# Altium PCB Project_2_Slave_PCB_V1_1.PcbDoc
Units mil, origin at the board's own origin, x right, y up, seen from the top; angles counter-clockwise.
Board outline 3444 x 3925 mil, 2 copper layers (Top Layer, Bottom Layer); 82 components, 95 nets, 252 pads, 68 vias.
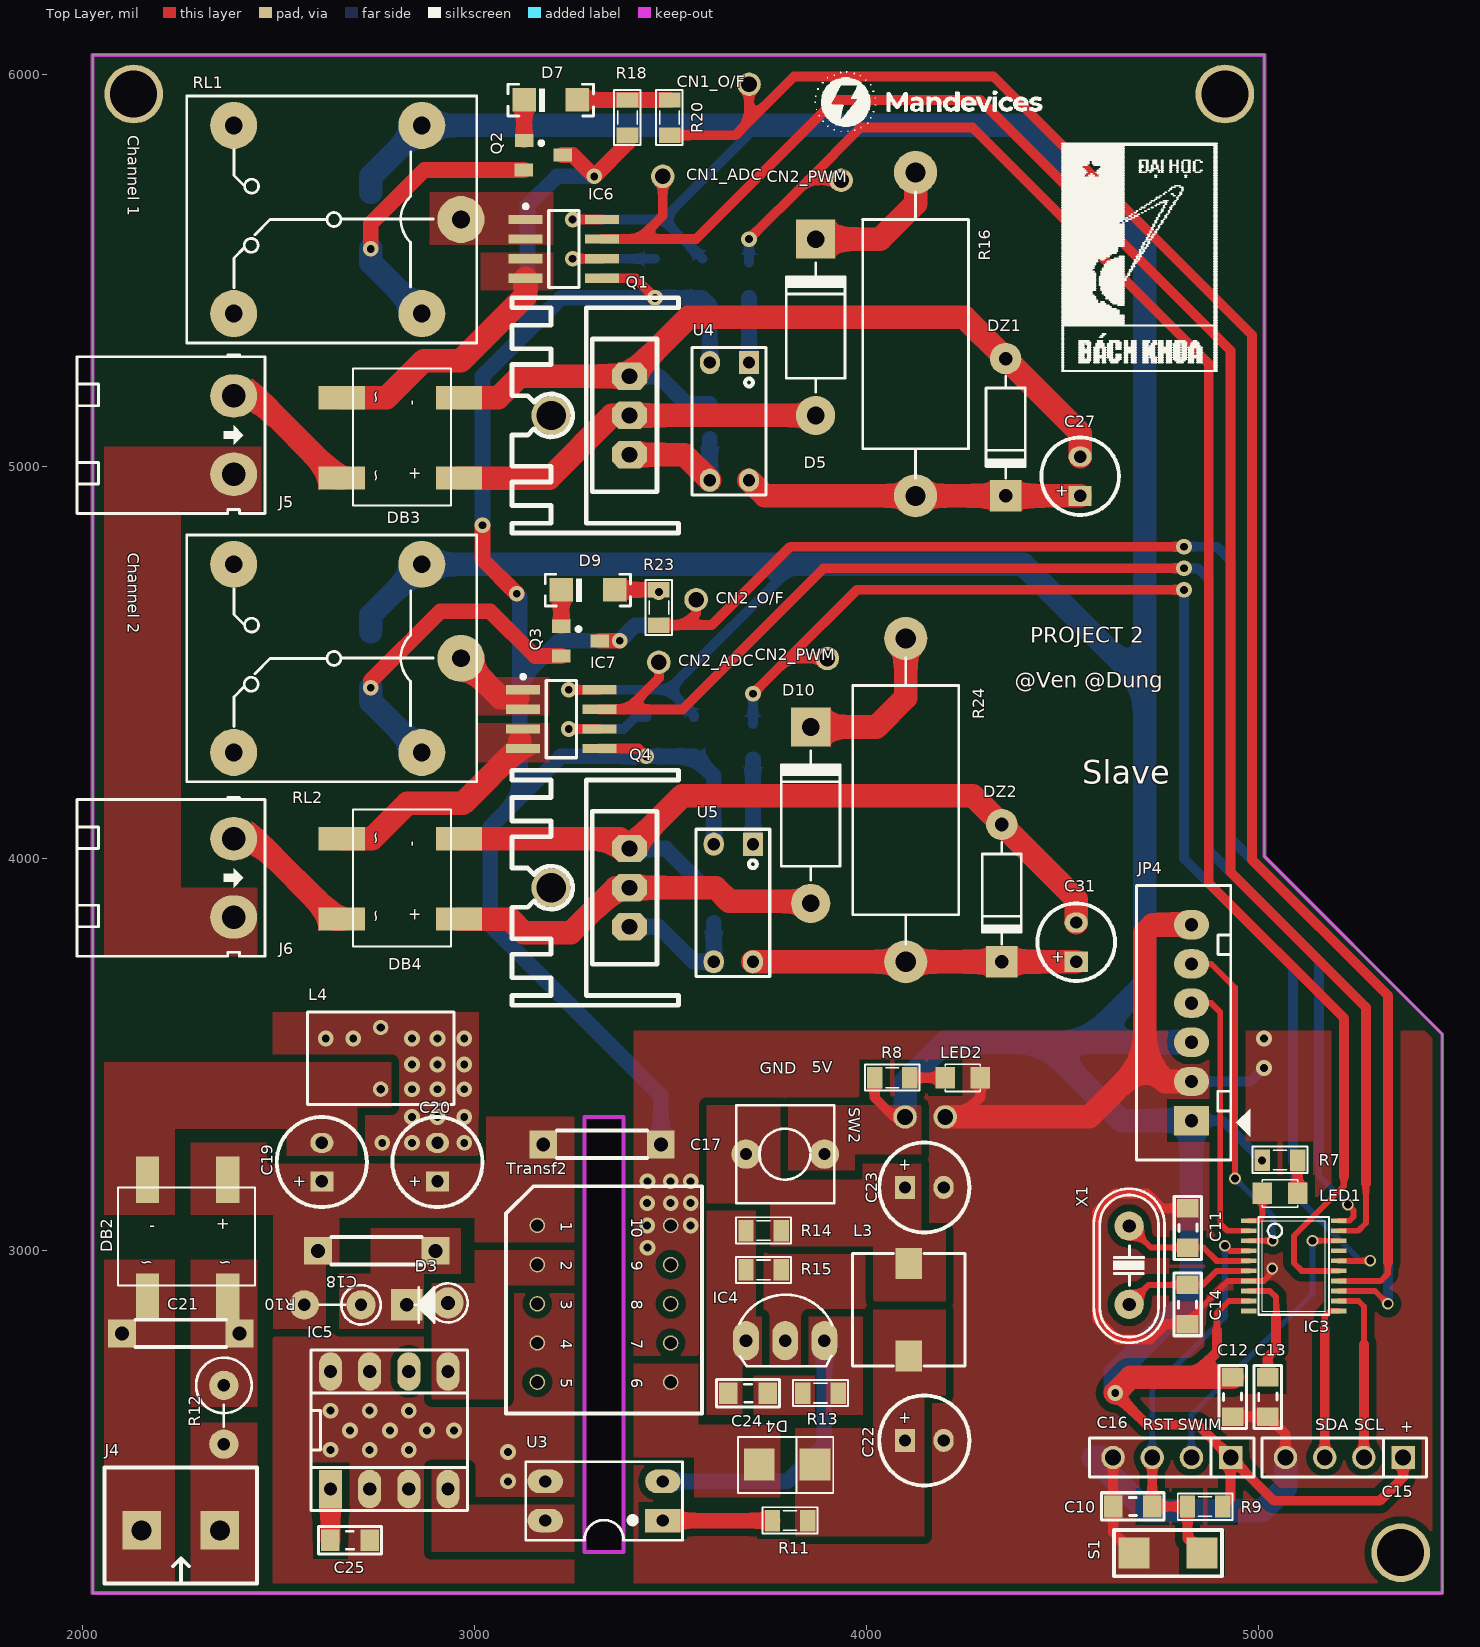
[diagram p0: Top Layer view]
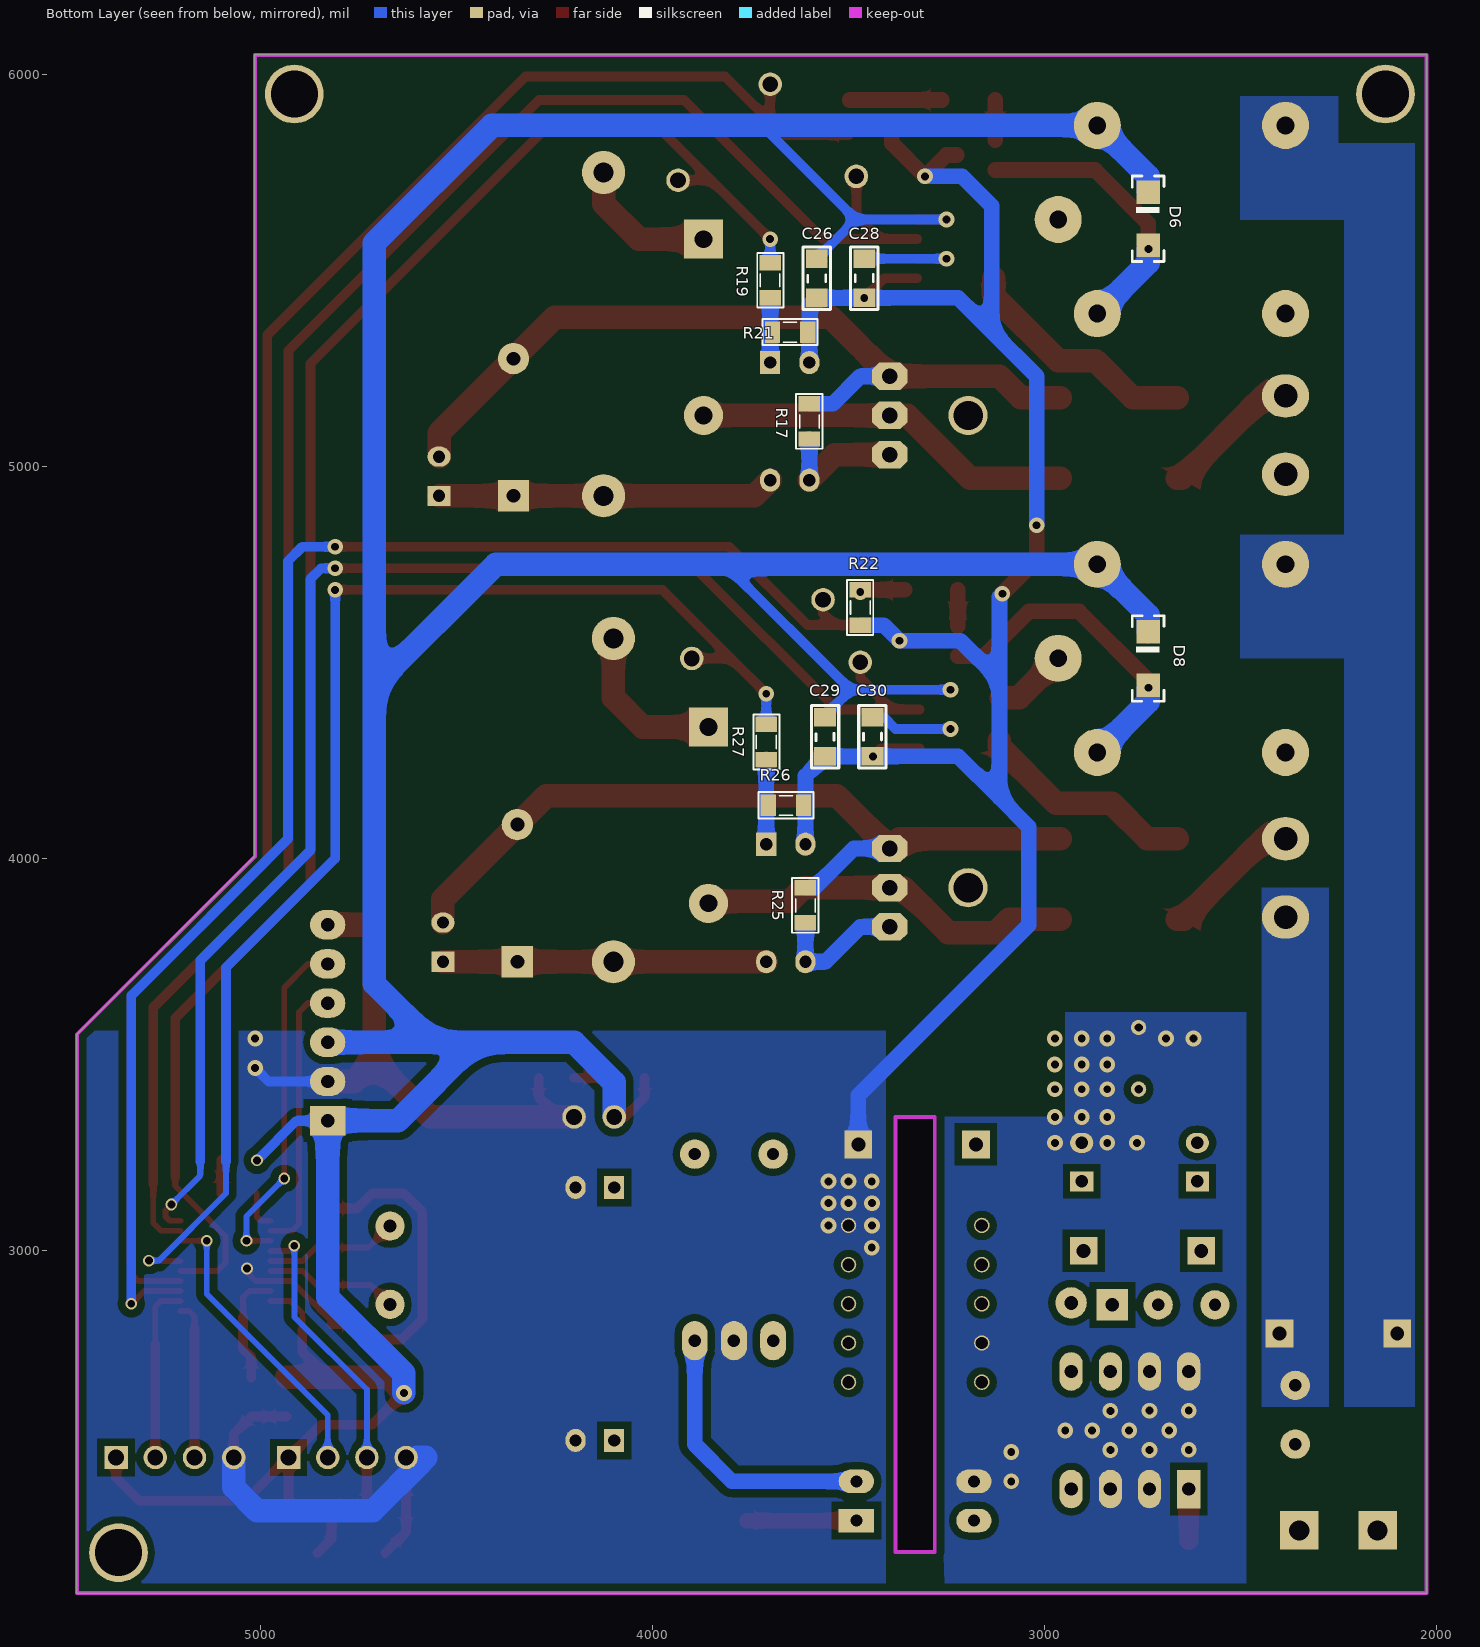
[diagram p1: Bottom Layer view, seen from below]
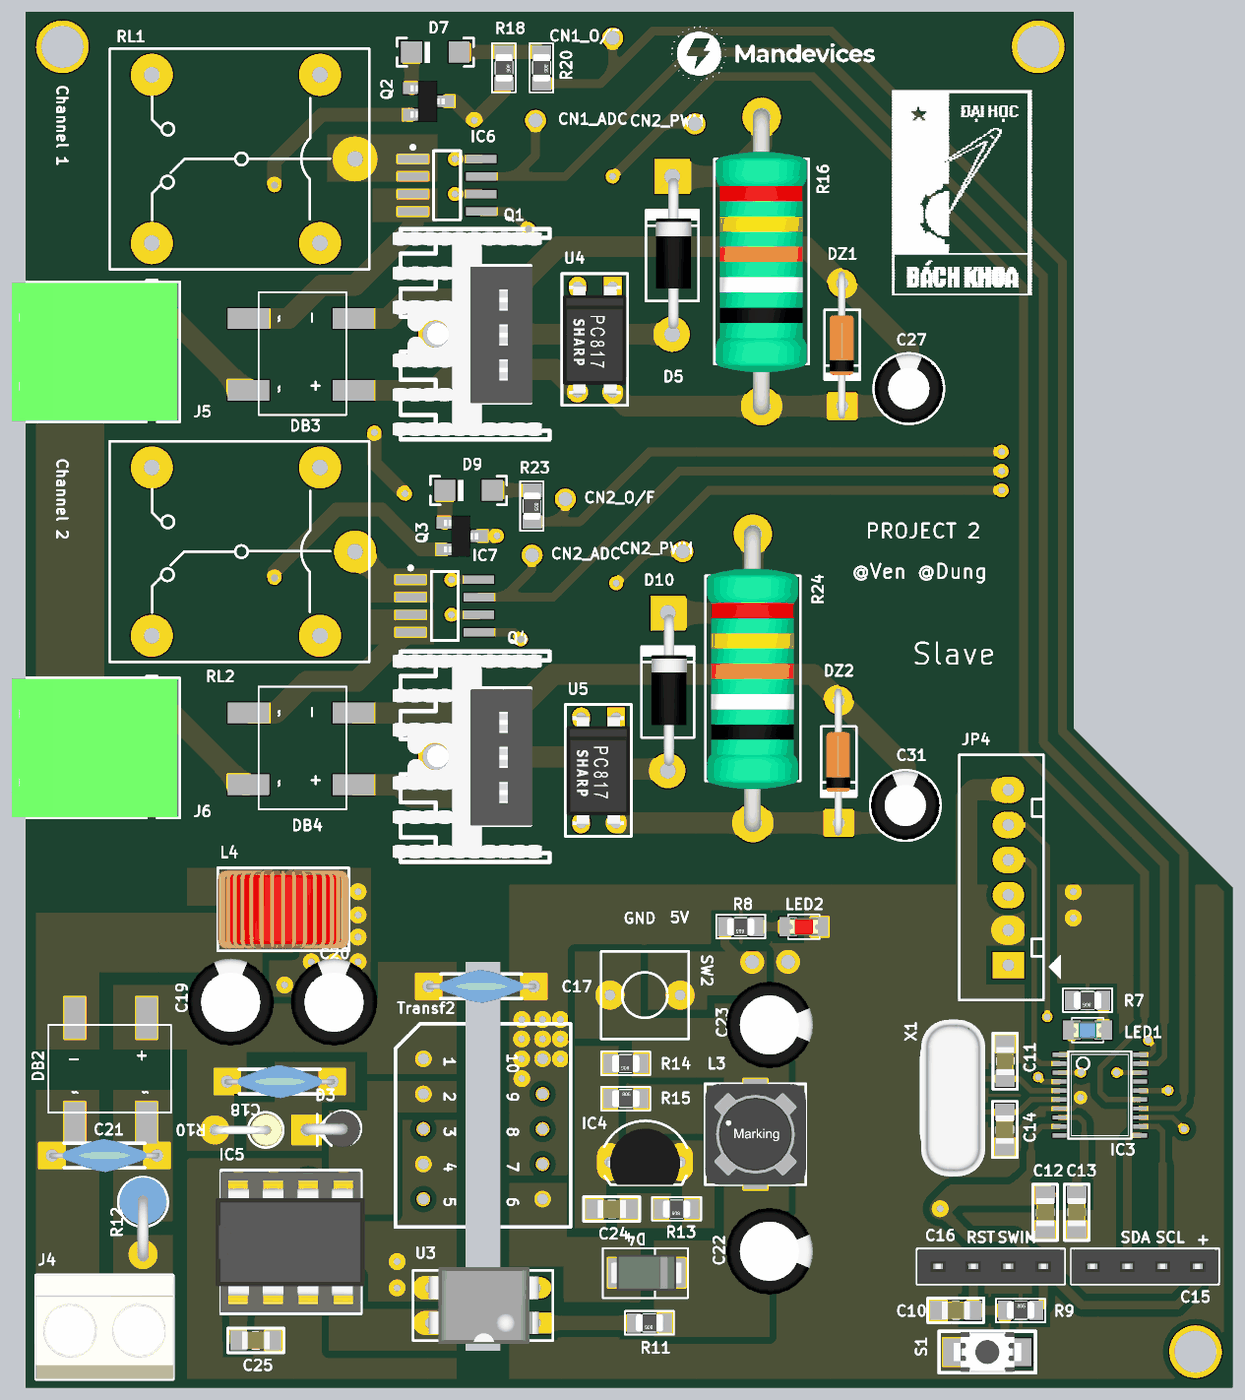
[diagram p2: 3D render of the assembled board from above, using the file's embedded part models]
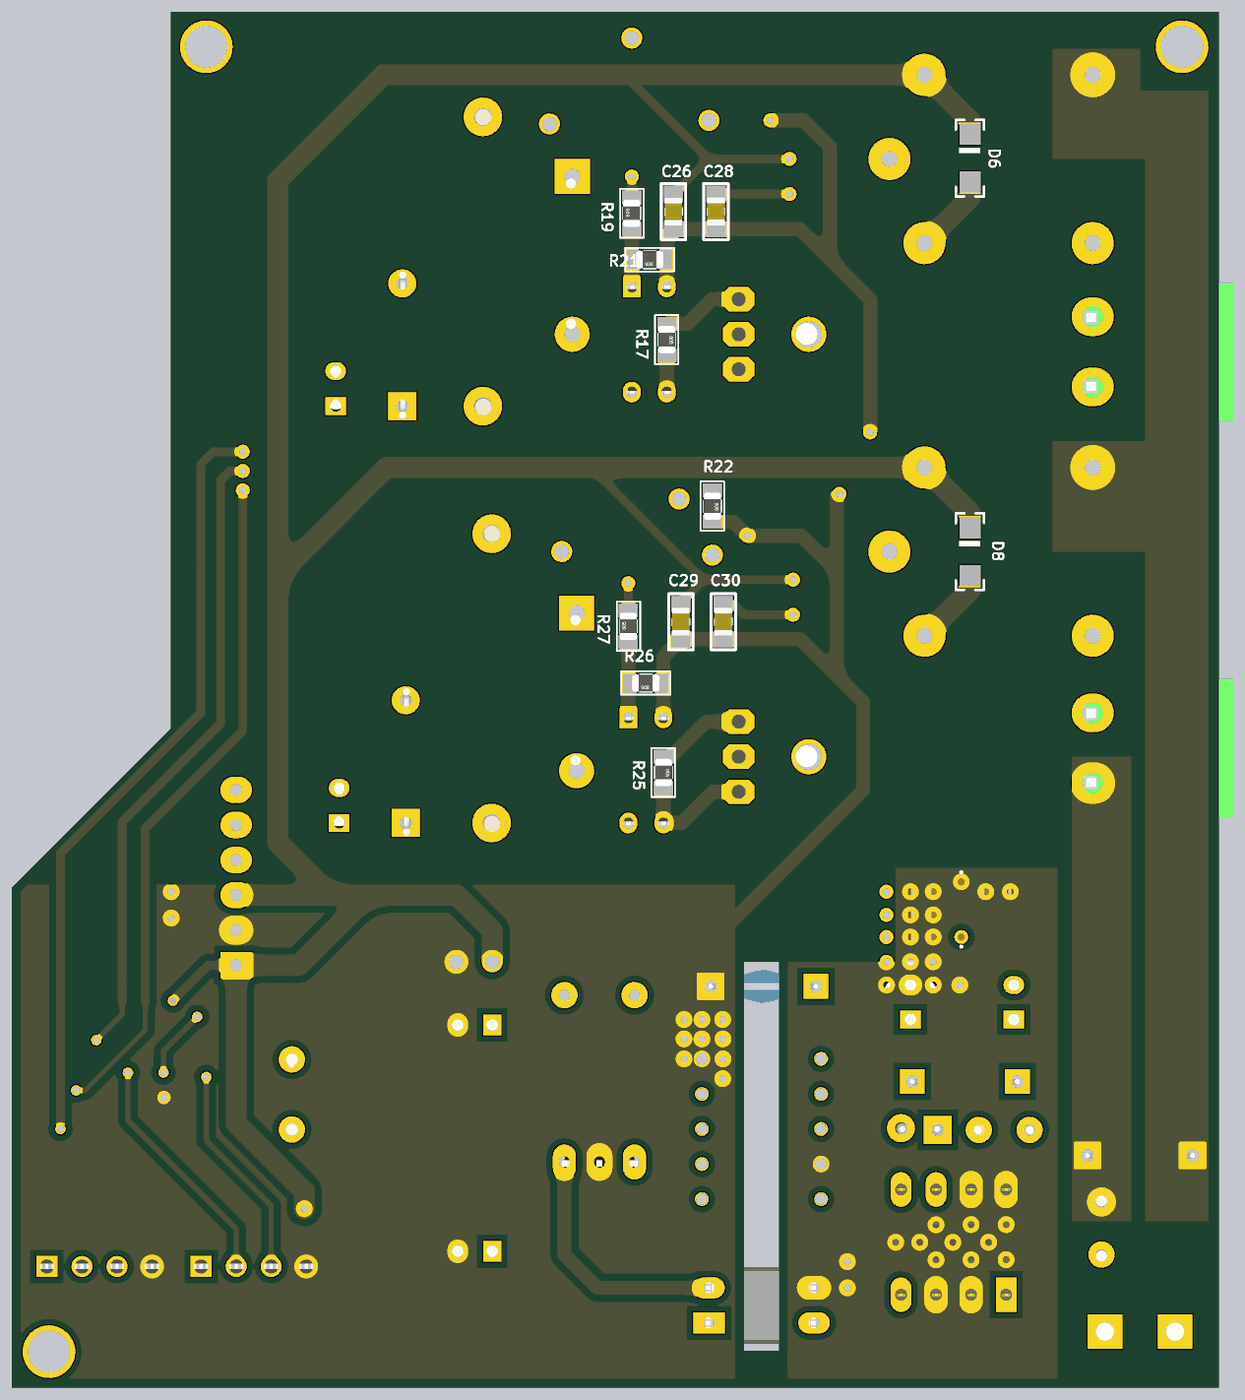
[diagram p3: 3D render of the assembled board from below, using the file's embedded part models]

## Layer stack, top to bottom
Top Solder: solder mask 0.4, Solder Resist, Dk 3.5
Top Layer: signal copper 1.4
Dielectric 1: dielectric 12.6, FR-4, Dk 4.8
Bottom Layer: signal copper 1.4
Bottom Solder: solder mask 0.4, Solder Resist, Dk 3.5

## Board outline
2025,2125 2025,6050 5015,6050 5015,4005 5469,3551 5469,2125
cut-out: 3280,2230 3380,2230 3380,3340 3280,3340

## Design rules (kind name [scope] priority, off if disabled: settings)
Clearance [All] p1: gap=20 ignorepadtopadclearanceinfootprint=TRUE except(0: Arc-Text Arc-Hole Track-Text Track-Hole SMDPad-Text SMDPad-Hole THPad-Text THPad-Hole Via-Text Via-Hole Fill-Text Fill-Hole Poly-Text Poly-Hole Region-Text Region-Hole Text-Text Text-Hole; 10: Arc-Arc Arc-Track Arc-SMDPad Arc-THPad Arc-Via Track-Track Track-SMDPad Track-THPad Track-Via SMDPad-SMDPad SMDPad-THPad SMDPad-Via THPad-THPad THPad-Via Via-Via; 18: THPad-Fill THPad-Poly THPad-Region)
PolygonConnect [All] p1: connectstyle=Direct reliefconductorwidth=10 reliefentries=4 polygonreliefangle="90 Angle" airgapwidth=10
RoutingVias [All] p1: holewidth=20 width=40 viastyle="Through Hole" minholewidth=15 minwidth=25 maxholewidth=25 maxwidth=45
SolderMaskExpansion [All] p1: expansion=4
Width [All] p1: maxlimit=60 minlimit=15 preferedwidth=25
30 further rules are at their usual default settings.

## Classes and differential pairs
component class 8: JP4
component class 7: C26 C27 C28 C29 C30 C31 D5 D6 D7 D8 D9 D10 DB3 DB4 DZ1 DZ2 IC6 IC7 J5 J6 Q1 Q2 Q3 Q4 R16 R17 R19 R20 R23 R24 R25 R26 R27 RL1 RL2 U4 U5
component class 6: C17 C18 C19 C20 C21 C22 C23 C24 C25 D3 D4 DB2 IC4 IC5 J4 L3 R10 R11 R12 R13 R14 R15 SW2 Transf2 U3
component class 5: C10 C11 C12 C13 C14 C15 C16 IC3 LED1 LED2 R7 R8 R9 S1 X1

## Components (designator, comment, footprint, x,y, rotation, side; value= is the part's Value field where it differs from the comment)
C10 "1uF" CAP_0805 4679,2347 r0 top value=33p
C11 "22pF" CAP_0805 4819,3056.61 r90 top value=33p
C12 "100nF" CAP_0805 4933,2625.5 r90 top value=33p
C13 "1uF" CAP_0805 5023,2625.5 r90 top value=33p
C14 "22pF" CAP_0805 4820,2861.61 r270 top value=33p
C15 "JP4" JP4-C1T 5369,2471 r180 top
C16 "JP4" JP4-C1T 4929,2471 r180 top
C17 "1nF/400v" 103/2KV 3475.04,3270 r180 top
C18 "1nF/400V" 103/2KV 2600,2998.34 r0 top
C19 "6.8uF/400V" C8mm 2610,3224.71 r90 top
C20 "6.8uF/400V" C8mm 2905,3224.71 r90 top
C21 "20D471K" 103/2KV 2100,2787.5 r0 top
C22 "1000uF/16V" C8mm 4147.38,2514.45 r0 top
C23 "470uF/16V" C8mm 4147.38,3160 r0 top
C24 "100nF" CAP_0805 3697.38,2636 r0 top value=33p
C25 "100nF" CAP_0805 2681.99,2259 r180 top value=33p
C26 "100nF" CAP_0805 3580,5480 r270 bottom value=33p
C27 "Cap Pol" C5mm 4545,4975 r90 top
C28 "10nF" CAP_0805 3461,5480 r90 bottom value=33p
C29 "100nF" CAP_0805 3559,4310 r270 bottom value=33p
C30 "10nF" CAP_0805 3440,4310 r90 bottom value=33p
C31 "Cap Pol" C5mm 4535,3786 r90 top
D3 "1N4937" DIO-1AN 2876.99,2860.5 r0 top value=1N5007
D4 "SS14" DO-214AC(SMA) 3775,2450 r180 top value=1N5007
D5 "1N4007" D2A 3870,5580 r270 top
D6 "1N4148" 1N4148_SMD 2735,5632.09 r90 bottom value="Diode c?m 1N5408"
D7 "1N4148" 1N4148_SMD 3193.91,5935 r180 top value="Diode c?m 1N5408"
D8 "1N4148" 1N4148_SMD 2735,4510 r90 bottom value="Diode c?m 1N5408"
D9 "1N4148" 1N4148_SMD 3288.91,4685 r180 top value="Diode c?m 1N5408"
D10 "1N4007" D2A 3857.5,4335 r270 top
DB2 "Diode Bridge" DB207S 2270,3030 r0 top
DB3 "Diode Bridge Flate" DB207S 2810,5070 r270 top
DB4 "Diode Bridge Flate" DB207S 2810,3945 r270 top
DZ1 "Zener-12V" D1A 4355,5275 r90 top
DZ2 "Zener-12V" D1A 4345,4086 r90 top
IC3 "STM8S003F3P6" TSSOP-20 5090,2960 r270 top value=24Cxx
IC4 "TL431" qto-92 3792.38,2769 r0 top
IC5 "TNY264" DIP8 2780,2540.5 r90 top
IC6 "Current Sensor IC" SOIC-8 3227.44,5555 r0 top
IC7 "Current Sensor IC" SOIC-8 3221,4355 r0 top
J4 "AC-IN" KF2-5.08 2250,2285 r180 top
J5 "LOAD1" KF2-5.08T 2385,5180 r270 top
J6 "LOAD2" KF2-5.08T 2385,4050 r270 top
JP4 "Con6" CON6 4829,3330.42 r90 top value="Connector 6"
L3 "2.2uF" L-SMD-M-7.3x4.5 4107.38,2848.11 r180 top value="150 mH"
L4 "100uF" L-DIP-M-9.5x6 2760,3489.5 r90 top value="150 mH"
LED1 "LED" LED-0805-Blue 5100,3145 r180 top value="LED 3 ly Single Colour"
LED2 "LED" LED-0805-Red 4200.51,3440 r0 top value="LED 3 ly Single Colour"
Q1 "IRF840" QTO-220H3 3395,5030 r90 top
Q2 "2SC1815" SOT23 3175,5795 r270 top value=C1815
Q3 "2SC1815" SOT23 3270,4555 r270 top value=C1815
Q4 "IRF840" QTO-220H3 3395,3825 r90 top
R7 "1k" RES-SMD-0805 5055,3230 r180 top
R8 "1k" RES-SMD-0805 4065.51,3440 r180 top
R9 "10k" RES-SMD-0805 4864,2346 r0 top
R10 "200k" RES-1/4WD 2645,2860.5 r180 top
R11 "200R" RES-SMD-0805 3805,2310 r180 top
R12 "2R" RES-1WD 2360,2590 r270 top
R13 "3.3k" RES-SMD-0805 3882.37,2635 r180 top
R14 "10k" RES-SMD-0805 3737.37,3050 r180 top
R15 "10k" RES-SMD-0805 3737.38,2950 r0 top
R16 "56k/2W" RES-2W 4120,5345 r270 top value="R1/4W - 1K"
R17 "10k" RES-SMD-0805 3600,5115 r270 bottom value="R1/4W - 1K"
R18 "100k" RES-SMD-0805 3390,5890 r270 top
R19 "1k" RES-SMD-0805 3700,5475 r90 bottom
R20 "100R" RES-SMD-0805 3497.25,5890 r270 top
R21 "100k" RES-SMD-0805 3649,5342.31 r0 bottom
R22 "100k" RES-SMD-0805 3470,4640 r270 bottom
R23 "100R" RES-SMD-0805 3470,4640 r270 top
R24 "56k/2W" RES-2W 4095,4156 r270 top value="R1/4W - 1K"
R25 "10k" RES-SMD-0805 3610,3880 r270 bottom value="R1/4W - 1K"
R26 "100k" RES-SMD-0805 3660,4135 r0 bottom
R27 "1k" RES-SMD-0805 3710,4297 r90 bottom
RL1 "Relay 10A/12V" RL_SPDT_10A 2965,5630 r180 top value="Relay SPDT, 10A, 12V"
RL2 "Relay 10A/12V" RL_SPDT_10A 2965,4510 r180 top value="Relay SPDT, 10A, 12V"
S1 "SW-SMD" "SW 3x2x4" 4769,2227 r0 top
SW2 "SW" SW2 3692.38,3245 r0 top value="SW chip 2 pin"
Transf2 "Transformer EE16" "Transformer EE12.7" 3330,2863.18 r270 top
U3 "PC817" DIP4/W0.3 3480,2310 r90 top
U4 "OPTO" OPTO 3700,5264 r270 top value=TLP5211
U5 "OPTO" OPTO 3710,4035 r270 top value=TLP5211
X1 "8Mhz" XT2 4670,2961.61 r90 top value=4Mhz

## Footprints (in the part's own frame and the unit in brackets; to place one, negate y for a bottom-side part, rotate by r counter-clockwise, add the part's x,y. Pads: shape width x height; smd on the part's side, far side on the other; paste and mask are expansions set on the pad)
1N4148_SMD [mil]
  rect 60x60 smd: 1(-67.91,0) 2(67.91,0)
  silkscreen extent -109,-40 109,41, body extent -71,-23 67,25, height 47
103/2KV [mm]
  rect 1.8x1.8 hole 0.9: 1(0,0) 2(7.62,0)
  silkscreen extent 0.89,-0.89 6.73,0.89, body extent -0.19,-1.2 7.81,1.19, height 9.03
C5mm [mm]
  rect 1.3x1.5 hole 0.8: 1(-1.27,0)
  oval 1.3x1.5 hole 0.8: 2(1.27,0)
  silkscreen extent -2.51,-2.51 2.51,2.51, body extent -2.5,-2.5 2.49,2.5, height 11.01
C8mm [mm]
  rect 1.3x1.5 hole 0.8: 1(-1.25,0)
  oval 1.3x1.5 hole 0.8: 2(1.25,0)
  silkscreen extent -2.92,-2.92 2.92,2.92, body extent -3.15,-3.15 3.16,3.15, height 11.51
CAP_0805 [mm]
  rect 1.2x1.4 smd: 1(-1.27,-0.025) 2(1.27,-0.025)
  silkscreen extent -2.03,-0.91 2.03,0.86, body extent -1.01,-0.66 1.01,0.61, height 0.61
CON6 [mil] "CON6"
  rect 75x90 hole 34: 1(0,0)
  oval 75x90 hole 34: 2(100,0) 3(200,0) 4(300,0) 5(400,0) 6(500,0)
  silkscreen extent -100,-150 600,140
D1A [mil] "Diode 1A, W 100mil, L 350mil"
  round 80 hole 35: 1(0,0)
  rect 80x80 hole 35: 2(-350,0)
  silkscreen extent -305,-50 -45,50, body extent -386,-33 34,36, height 84
D2A [mil] "Diode 2A, W 150mil, L 450mil"
  round 100 hole 45: 1(450,0)
  rect 100x100 hole 45: 2(0,0)
  silkscreen extent 61,-75 391,75, body extent 5,-47 435,54, height 100
DB207S [mm] "Bridge Rectifiers 2A 1000V"
  rect 1.5x3 smd: 1(2.54,3.81) 2(2.54,-3.785) 3(-2.667,-3.785) 4(-2.667,3.81)
  silkscreen extent -4.57,-3.05 4.32,3.3
DIO-1AN [mil] "Diode 1A, W 100mil, L 150mil"
  round 80 hole 35: 1(55,5)
  rect 80x80 hole 35: 2(-50,0)
  silkscreen extent -30,-45 105,55, body extent -64,-50 104,55, height 252
DIP4/W0.3 [mil] "4 PIN, W 300mil, Pin to pin 100mil"
  rect 60x90 hole 31: 1(0,0)
  oval 60x90 hole 31: 2(100,0) 3(100,300) 4(0,300)
  silkscreen extent -50,-50 150,350, body extent -59,-10 159,305, height 170
DIP8 [mm]
  rect 2.5x1.5 hole 0.864: 1(-3.81,3.759)
  oval 2.5x1.5 hole 0.864: 2(-3.81,1.219) 3(-3.81,-1.321) 4(-3.81,-3.861) 5(3.81,-3.861) 6(3.81,-1.321) 7(3.81,1.219) 8(3.81,3.759)
  silkscreen extent -5.21,-5.13 5.21,5.03, body extent -5.08,-5.4 5.08,5.4, height 8.1
DO-214AC(SMA) [mm] "DO-214AC Diode Smallest Size"
  rect 2x2.1 smd: 1(1.245,-0.076) 2(-2.367,-0.076)
  silkscreen extent -3.56,-1.86 2.62,1.76, body extent -3.13,-1.38 2.07,1.22, height 2.4
JP4-C1T [mm] "4 row, straight, gold plating"
  rect 1.52x1.52 hole 1.02: 1(0,0)
  round 1.52 hole 1.02: 2(2.54,0) 3(5.08,0) 4(7.62,0)
  silkscreen extent -1.52,-1.27 9.14,1.27, body extent -1.52,-1.25 9.14,1.25, height 8.51
KF2-5.08 [mm]
  rect 2.5x2.5 hole 1.3: 1(-2.54,0) 2(2.54,0)
  silkscreen extent -4.95,-4.08 4.95,3.43, body extent -5,-4.07 5,3.43, height 10
KF2-5.08T [mil] "Header 2, 2 pin, hight 300mil, Pin to Pin 200, Colour Green"
  oval 110x120 hole 60: 1(0,0) 2(200,0)
  silkscreen extent -105,-400 300,80, body extent -97,-399 297,73, height 334
L-DIP-M-9.5x6 [mm] "Body 9.5x6mm, 2 leads"
  round 1 hole 0.55: 1(-2,0) 2(2,0)
  silkscreen extent -3,-4.75 3,4.75, body extent -2.85,-4.75 2.85,4.75, height 9.75
L-SMD-M-7.3x4.5 [mm] "WE-PDA SMD Shielded Power Inductor, 7345"
  rect 1.7x2 smd: 1(0,3) 2(0,-3)
  silkscreen extent -3.65,-3.65 3.65,3.65, body extent -3.65,-3.65 3.65,3.65, height 4.05
LED-0805-Blue [mil]
  rect 50x55 smd: 1(0,0) 2(90,0)
  silkscreen extent 0,-35 90,35, body extent 5,-25 85,25, height 43
LED-0805-Red [mil]
  rect 50x55 smd: 1(0,0) 2(90,0)
  silkscreen extent 0,-35 90,35, body extent 5,-25 85,25, height 43
OPTO [mm]
  rect 1.5x1.3 hole 0.8: 1(-0.025,0)
  oval 1.5x1.3 hole 0.8: 2(-0.025,-2.54) 3(7.595,-2.54) 4(7.595,0)
  silkscreen extent -0.99,-3.68 8.56,1.09, body extent -0.13,-3.59 7.75,1, height 4.81
qto-92 [mil] "TO-92"
  oval 66x100 hole 32: 1(-100,0) 2(0,0) 3(100,0)
  silkscreen extent -117,-65 120,118, body extent -109,-66 109,95, height 245
QTO-220H3 [mil] "TO-220 1-2-3"
  oct 70x90 hole 40: 1(0,0) 2(100,0) 3(200,0)
  round 100 hole 75: ""(100,200)
  silkscreen extent -200,-125 400,300, body extent -190,-102 392,323, height 984
RES-1/4WD [mil]
  round 75 hole 31.5: 1(-65,0) 2(80,0)
  silkscreen extent -115,-50 40,50, body extent -112,-45 92,46, height 379
RES-1WD [mil]
  round 75 hole 31.5: 1(-65,0) 2(85,0)
  silkscreen extent -136,-71 40,71, body extent -135,-67 105,67, height 498
RES-2W [mil] "R2W, 2 pin, 700mil"
  round 110 hole 51.18: 1(-405,5) 2(420,5)
  silkscreen extent -355,-130 375,140, body extent -428,-126 446,134, height 277
RES-SMD-0805 [mil]
  rect 39.37x55 smd: 1(-45,0) 2(45,0)
  silkscreen extent -70,-34 70,33, body extent -39,-25 39,25, height 31
RL_SPDT_10A [mil] "Relay SPDT, 5 pin, 10A,W 650mil, L 800mil, H 800mil"
  round 120 hole 45: 1(0,0) 2(580,240) 3(580,-240) 4(100,-240) 5(100,240)
  silkscreen extent -40,-315 700,315
SOIC-8 [mm] "SOIC, 8-Leads, Body 5,0x4,0mm (max), Pitch 1,27mm, IPC Medium Density"
  rect 2.2x0.6 smd: 1(-2.475,1.905) 2(-2.475,0.635) 3(-2.475,-0.635) 4(-2.475,-1.905) 5(2.475,-1.905) 6(2.475,-0.635) 7(2.475,0.635) 8(2.475,1.905)
  silkscreen extent -2.6,-2.5 0.98,2.88, body extent -3.2,-2.5 3.2,2.5, height 1.75
SOT23 [mm] "SOT 23 _ 1-3-2"
  rect 0.85x1.2 smd: 1(-0.94,-1.245) 2(0.985,-1.25) 3(0.005,1.25)
  silkscreen extent -0.88,-0.25 -0.64,0, body extent -1.47,-1.33 1.53,1.17, height 1.06
SW2 [mil] "SW button 2pin, 250x 250 mil"
  round 75 hole 31: 1(0,0) 2(200,0)
  silkscreen extent -25,-125 225,125
"SW 3x2x4" [mm]
  rect 2x2 smd: 1(-2.2,0) 2(2.2,0)
  silkscreen extent -3.5,-1.5 3.5,1.5, body extent -2.45,-1.45 2.45,1.45, height 2
"Transformer EE12.7" [mm]
  round 1 hole 0.8: 1(-5.08,-4.318) 2(-2.54,-4.318) 3(0,-4.318) 4(2.54,-4.318) 5(5.08,-4.318) 6(5.08,4.318) 7(2.54,4.318) 8(0,4.318) 9(-2.54,4.318) 10(-5.08,4.318)
  silkscreen extent -7.62,-6.35 7.11,6.35
TSSOP-20 [mil] "TSSOP-20"
  rect 12x39 smd: 1(-115.16,-114.87) 2(-89.57,-114.87) 3(-63.98,-114.87) 4(-38.39,-114.87) 5(-12.8,-114.87) 6(12.8,-114.87) 7(38.39,-114.87) 8(63.98,-114.87) 9(89.57,-114.87) 10(115.16,-114.87) 11(115.16,114.87) 12(89.57,114.87) 13(63.98,114.87) 14(38.39,114.87) 15(12.8,114.87) 16(-12.8,114.87) 17(-38.39,114.87) 18(-63.98,114.87) 19(-89.57,114.87) 20(-115.16,114.87)
  silkscreen extent -125,-90 125,90
XT2 [mil] "Footpin for Crystal 2 pin"
  round 75 hole 34: 1(-100,0) 2(100,0)
  silkscreen extent -198,-90 195,90, body extent -233,-93 213,90, height 138

## Part data
C10 C11 C12 C13 C14 C24 C25 C26 C28 C29 C30: library part CapSMD, "Capacitor", LatestRevisionDate=17-Jul-2002, LatestRevisionNote="Re-released for DXP Platform.", PackageReference=RAD-0.3, Published=8-Jun-2000, Publisher="Altium Limited"
C15 C16: "WR-PHD 2.54 mm Angled Socket Header", Manufacturer="Würth Elektronik eiSos GmbH", partNo=613004143121, ComponentLink1 Description=Manufacturer, ComponentLink1URL=http://www.we-online.com, ComponentLink2 Description=Datasheet, ComponentLink2URL=http://katalog.we-online.de/em/datasheet/6130xx143121.pdf, Created by="Karrer Zheng", Created Date="29 March 2013", NoPins=04
C17 C18: library part Cap2KV, "CAP CERAMIC", LatestRevisionDate=17-Jul-2002, LatestRevisionNote="Re-released for DXP Platform.", PackageReference=RAD-0.3, Published=8-Jun-2000, Publisher="Altium Limited"
C19 C20 C22 C23: library part "Cap Pol", "Polarized Capacitor (Axial)", LatestRevisionDate=17-Jul-2002, LatestRevisionNote="Re-released for DXP Platform.", PackageReference=POLAR0.8, Published=8-Jun-2000, Publisher="Altium Limited"
C21: library part Cap2KV, "Varistor", LatestRevisionDate=17-Jul-2002, LatestRevisionNote="Re-released for DXP Platform.", PackageReference=RAD-0.3, Published=8-Jun-2000, Publisher="Altium Limited"
C27 C31: "Polarized Capacitor (Axial)", LatestRevisionDate=17-Jul-2002, LatestRevisionNote="Re-released for DXP Platform.", PackageReference=POLAR0.8, Published=8-Jun-2000, Publisher="Altium Limited"
D3: library part "Diode SMD", "Diode Schottky / 1N4937", Code - JEDEC=DO-214-AB, Published=8-Jun-2000, Publisher="Altium Limited", Revision="July-2002: Re-released for DXP Platform."
D4: library part "Diode SMD", "Diode Schottky / 1N5819", Code - JEDEC=DO-214-AB, Published=8-Jun-2000, Publisher="Altium Limited", Revision="July-2002: Re-released for DXP Platform."
D5 D10: library part D1A, "Diode 1A"
D6 D7 D8 D9: library part 1N5822, "Schottky Rectifiers"
DB2: library part "Diode Bridge Flate"
DB3 DB4: "Diode Bridge"
DZ1 DZ2: library part Zener
IC3: "MCU 8BIT  8KB FLASH TSSOP-20", Copyright by=VanDungEvn
IC4: "Programmable Shunt Regulator"
IC5: "Enhanced, Energy Efficient, Low Power Off-line Switcher"
IC6 IC7: library part ACS712
J4 J5 J6: library part KF2, Manufacturer="Würth Elektronik eiSos GmbH", partNo=691103110002, ComponentLink1 Description=Manufacturer, ComponentLink1URL=http://www.we-online.com, ComponentLink2 Description=Datasheet, ComponentLink2URL=http://katalog.we-online.de/em/datasheet/6911031100xx.pdf, Created by="Karrer Zheng", Created Date="29 October 2013", NoPins=2
JP4: "PLC module"
L3 L4: library part L-DIP-1, "Inductor"
LED1 LED2: "LED Single colour Green and Red"
Q1 Q4: "MOSFET N - CHANNEL 500V - 0.75 - 8A - TO-220"
Q2 Q3: "NPN 600mW, ECB", =C2383
R7 R8 R9 R10 R11 R12 R13 R14 R15 R18 R19 R20 R21 R22 R23 R26 R27: library part "Resistor - SMD", "Resistor", Manufacturer="Generic Components", Class=Passive, Published=08/06/2000, Publisher="Altium Hobart Technology Centre"
R16 R17 R24 R25: library part "Resistor - DIP", "Resistor - DIP"
RL1 RL2: library part "Relay 1", "Relay SPDT,10A - 12VDC 5 Pin", ="Relay SPDT, 10A, 24V"
S1: "Switch", LatestRevisionDate=17-Jul-2002, LatestRevisionNote="Re-released for DXP Platform.", PackageReference=SPST-2, Published=24-Mar-1999, Publisher="Altium Limited"
SW2: library part SW2, "Switch button 2 pin"
Transf2: library part "Tranformer EE16"
U3 U4 U5: "Single Opto"
X1: library part XT2, "Crystal For all Crystal 2pin."

## Free pads (board coordinates)
  round 150 hole 120: 0(2130,5950) 0(4914.23,5950) 0(5363,2228)
  round 60 hole 40: 4(3480,5740) 5(3470,4500) 6(4098.16,3340) 6(4200.51,3340) 7(3900,4510) 8(3565,4660) 9(3700,5975) 10(3935,5730)

## Via types
v1: diameter 40, hole 20, Top Layer to Bottom Layer, 59 vias
v2: diameter 30, hole 20, Top Layer to Bottom Layer, 9 vias

## Nets (pads, with @x,y where several pads share a name; then routed paths per layer and width w, separated by ;. In a path a pad name is that pad's centre, name@x,y a point inside that pad or via, vN(x,y) a via of type N, cw(c..) or ccw(c..) an arc to the next point about the centre after c; other vN are vias at no path point)
3.3V: 
5V: C12.2 C15.1 C16.1 C26.1 C29.1 D6.2 D8.2 IC3.9 IC6.8 IC7.8 JP4.1 JP4.3 pad.6@4098.16,3340 R7.2 R8.2 R9.2 RL1.4 RL2.4 SW2.2 | length 12291.1
  Top Layer w15: 4893.91,2795 4893.91,2839.68 4924.67,2870.43 IC3.9
  Top Layer w25: v1(3240,4430) IC7.8 ; v1(3250,5630) IC6.8 ; R8.2 4020.51,3390 4070.51,3340 pad.6@4098.16,3340 ; v1(4634.43,2635.75) 4715.71,2554.47 4845.53,2554.47 C16.1 ; 4829,2675.5 4893.91,2740.41 4893.91,2795 ; R9.2 4929,2366 C16.1 ; C15.1 5369,2419.93 5309.45,2360.38 5039.62,2360.38 C16.1
  Top Layer w60: v1(4634.43,2635.75) 4674.19,2675.5 4829,2675.5 C12.2
  Bottom Layer w25: v1(3240,4430) 3495,4430 ; v1(3250,5630) 3481,5630 ; C29.1 3560,4365 3495,4430 ; C26.1 3481,5630 ; 3720,5870 3720,5869 3481,5630 ; 3815,4750 3495,4430 ; JP4.1 4908.18,3330.42 v2(5009.4,3229.2)
  Bottom Layer w60: D8.2 2735,4620 RL2.4 3815,4750 4400,4750 4710,4440 ; D6.2 2735,5740 RL1.4 3720,5870 4410,5870 4710,5570 4710,4440 ; pad.6@4098.16,3340 4098.16,3428.16 4200.42,3530.42 4450,3530.42 ; v1(4634.43,2635.75) 4634.43,2685.45 4829,2880.02 JP4.1 4650,3330.42 4450,3530.42 ; JP4.3 4560.42,3530.42 ; 4450,3530.42 4560.42,3530.42 ; 4560.42,3530.42 4710,3680 4710,4440
AC1: C21.2 DB2.2 J5.2 J6.2 R12.1
AC2: C21.1 DB2.3 J4.2 RL1.3 RL2.3
CS: 
DC: 
GND: C10.1 C11.2 C12.1 C13.1 C14.2 C15.4 C16.4 C17.1 C22.2 C23.2 C26.2 C28.1 C29.2 C30.1 IC3.7 IC4.2 IC6.5 IC7.5 JP4.2 JP4.6 LED2.2 pad.6@4200.51,3340 Q2.3 Q3.3 R15.2 R18.2 R21.1 R22.2 R26.1 S1.1 Transf2.10 U4.2 U5.2 | length 9042.4
  Top Layer w15: C14.2 4819,2818.79 4921.83,2921.61 IC3.7 5013.42,2921.61 5035,2943.2 v2(5035,2952.98)
  Top Layer w25: IC7.5 3418,4280 v1(3438,4260) ; IC6.5 3410,5480 v1(3460,5430) ; v1@3369.8,4554.8 v1(3370,4555) ; C22.2@4207.38,2514.45 C22.2@4207.38,2526.38 ; 4240.51,3340 4290.51,3390 LED2.2 ; C16.4 C10.1 4629,2280.39 S1.1 ; C14.2 4763.49,2811.61 4723.61,2771.74 4640.36,2771.74 4587.26,2824.84 4587.26,3069.96 4587.69,3070.4 4587.69,3098.26 4634.43,3145 4715.71,3145 4754.1,3106.61 C11.2 ; C12.1 C13.1 5069,2530.5 C15.4
  Top Layer w40: v1(3020,4850) 3020,4762.5 v1(3107.5,4675) ; Q2.3 3250.2,5794.8 v1(3305,5740) 3390,5825 R18.2 ; Q3.3 v1@3369.8,4554.8
  Top Layer w60: pad.6@4200.51,3340 4240.51,3340 4567.99,3340 4710,3482.01 ; JP4.2 4761.59,3430.42 4710,3482.01 ; JP4.6 4730.42,3830.42 4710,3810 4710,3482.01
  Bottom Layer w25: 4589.6,2459.85 4600.75,2471 C16.4 ; JP4.2 4979.65,3430.42 v1(5014.23,3465)
  Bottom Layer w40: v1(3020,4850) 3020,5230 3135,5345 ; v1(3107.5,4675) 3115,4667.5 3115,4455 ; v1(3305,5740) 3210,5740 3135,5665 3135,5345 ; R22.2 3410,4595 v1(3370,4555) 3215,4555 3115,4455 ; C17.1 3475.04,3394.96 3040,3830 3040,4080 3115,4155 ; U4.2 3600,5411 C26.2 v1(3460,5430) 3220,5430 3135,5345 ; U5.2 3610,4210 C29.2 C30.1 v1(3438,4260) 3220,4260 3115,4155 ; 3115,4155 3115,4455
  Bottom Layer w60: 4578.45,2471 C16.4@4600.75,2471 ; 4589.6,2459.85 4714.2,2335.25 5009.25,2335.25 5069,2395 C15.4
  other v1: 3440.79,3006.61 3440,3063.18 3551.11,3063.18 3440,3120 3500,3120 3551.11,3120 3440.79,3175.5 3500,3175.5 3551.11,3175.5 5014.23,3540
GND1: C27.2 DB3.4 DZ1.1 Q1.3 R17.1 | length 2086.1
  Top Layer w60: DB3.4 3060,5175 3115,5230 Q1.3 3545,5380 4250,5380 DZ1.1 4545,5085 C27.2
  Bottom Layer w40: Q1.3 3470,5230 3540,5160 R17.1
GND2: C31.2 DB4.4 DZ2.1 Q4.3 R25.1 | length 2067
  Top Layer w60: DB4.4 3370,4050 Q4.3 3530,4160 4271,4160 DZ2.1 4535,3896 C31.2
  Bottom Layer w40: Q4.3 3487,4025 3587,3925 R25.1
GND_IN: C20.2 C25.1 IC5.2 IC5.3 IC5.7 IC5.8 L4.2 Transf2.4 U3.3
  other v1: 3085,2410 3085,2484.84 2631.99,2490.5 2731.99,2490 2831.99,2490 2682.01,2540 2784.06,2540 2878.49,2540 2947.01,2540 2631.99,2590.5 2731.99,2590.5 2831.99,2590 2764.07,3273.93 2840,3273.93 2973.2,3273.93 2840,3340 2905,3340 2973.51,3340 2840,3410.76 2904.99,3410.76 2973.51,3410.64 2840,3473.81 2904.99,3473.81 2973.51,3473.84 2620,3540 2690,3540 2840,3540 2904.99,3540 2973.51,3540
I1_IN: IC6.1 IC6.2 RL1.1
I1_OUT: DB3.3 IC6.3 IC6.4 | length 621.7
  Top Layer w60: DB3.3 2775,5175 2870,5270 2965,5270 3130,5435 IC6.4
I2_IN: IC7.1 IC7.2 RL2.1 | length 186.4
  Top Layer w60: RL2.1 3065,4410 3110,4410
I2_OUT: DB4.3 IC7.3 IC7.4 | length 566.3
  Top Layer w60: DB4.3 2738,4050 2828,4140 2970,4140 3115,4285 3115,4300
LED: 
MOSI: 
NetC1_2: 
NetC2_2: 
NetC3_2: 
NetC5_1: 
NetC5_2: 
NetC6_1: 
NetC7_1: 
NetC8_1: 
NetC8_2: 
NetC9_2: 
NetC13_2: C13.2 IC3.8 | length 289.8
  Top Layer w15: IC3.8 5029.11,2896.02 5045,2880.14 5045,2827.88
  Top Layer w25: C13.2 5024,2727.29 5045,2748.29 5045,2827.88
NetC17_2: C17.2 C18.1 C19.1 C20.1 DB2.1 R10.2 Transf2.1
NetC18_2: C18.2 D3.2 R10.1
NetC19_2: C19.2 DB2.4 L4.1
NetC22_1: C22.1 D4.2 L3.1 R11.1
NetC23_1: C23.1 L3.2 R14.1 SW2.1
NetC24_1: C24.1 IC4.1 R14.2 R15.1
NetC24_2: C24.2 R13.2
NetC25_2: C25.2 IC5.1 | length 130.5
  Top Layer w50: C25.2 IC5.1
NetC27_1: C27.1 DZ1.2 R16.2 U4.4 | length 861.6
  Top Layer w60: U4.4 3740,4925 R16.2 DZ1.2 C27.1
NetC28_2: C28.2 IC6.6 | length 284.9
  Top Layer w25: v1(3250,5530) IC6.6
  Bottom Layer w25: v1(3250,5530) C28.2
NetC30_2: C30.2 IC7.6 | length 289.9
  Top Layer w25: v1(3240,4330) IC7.6
  Bottom Layer w25: v1(3240,4330) 3380,4330 3410,4360 C30.2
NetC31_1: C31.1 DZ2.2 R24.2 U5.4 | length 825
  Top Layer w60: U5.4 R24.2 DZ2.2 C31.1
NetD1_1: 
NetD2_1: 
NetD3_1: D3.1 IC5.5 Transf2.2
NetD4_1: D4.1 Transf2.6
NetD5_1: D5.1 DB3.1 Q1.2 | length 976.3
  Top Layer w60: DB3.1 3190,4970 3350,5130 Q1.2 D5.1
NetD5_2: D5.2 R16.1 | length 372.3
  Top Layer w60: D5.2 4035,5580 4125,5670 R16.1
NetD6_1: D6.1 Q2.2 RL1.5 | length 731.1
  Top Layer w40: v1(2735,5555) 2735,5620 2871.2,5756.2 Q2.2
  Bottom Layer w60: v1(2735,5555) 2735,5520 RL1.5
NetD7_1: D7.1 R18.1 R20.1 | length 235.4
  Top Layer w40: D7.1 R18.1 R20.1
NetD7_2: D7.2 Q2.1 | length 103
  Top Layer w40: Q2.1 D7.2
NetD8_1: D8.1 Q3.2 RL2.5 | length 843.1
  Top Layer w40: v1(2735,4435) 2735,4453 2912,4630 3040,4630 3153.8,4516.2 Q3.2
  Bottom Layer w60: v1(2735,4435) 2735,4400 RL2.5
NetD9_1: D9.1 R22.1 R23.1 | length 113.2
  Top Layer w40: D9.1 R23.1
  other v1: 3470.01,4679.36
NetD9_2: D9.2 Q3.1 | length 93
  Top Layer w40: Q3.1 D9.2
NetD10_1: D10.1 DB4.1 Q4.2 | length 976.2
  Top Layer w60: DB4.1 3090,3845 3125,3810 3245,3810 3360,3925 Q4.2 3615,3925 3650,3890 3852.5,3890 D10.1
NetD10_2: D10.2 R24.1 | length 424.6
  Top Layer w60: D10.2 4025,4335 4100,4410 R24.1
NetDB3_2: DB3.2 J5.1 | length 363
  Top Layer w60: J5.1 2440,5180 2650,4970 DB3.2
NetDB4_2: DB4.2 J6.1 | length 360.9
  Top Layer w60: J6.1 2440,4050 2645,3845 DB4.2
NetIC1_3: 
NetIC2_4: 
NetIC3_1: IC3.1 LED1.2 | length 98.8
  Top Layer w15: IC3.1 4999.92,3075.16 5010,3085.24 LED1.2
NetIC3_13: IC3.13 pad.8 R23.2 | length 3835.7
  Top Layer w15: IC3.13 5297.32,2896.02 v2(5330.16,2863.18)
  Top Layer w25: R23.2 3535,4595 ; pad.8 3565,4625 3535,4595 ; v1(4810,4795) 3805,4795 3605,4595 3535,4595
  Bottom Layer w25: v1(4810,4795) 4894.04,4795 4930.06,4758.98 4930.06,4049.95 5330.16,3649.85 v2(5330.16,2863.18)
NetIC3_14: IC3.14 pad.9 R20.2 | length 4585.8
  Top Layer w15: IC3.14 5311.83,2921.61 5330.21,2940 5330.21,2969.36
  Top Layer w25: R20.2@3500,5845 3665,5845 3700,5880 ; pad.9 3700,5880 ; 5330.21,2969.36 5330.21,3649.35 4983.28,3996.29 4983.28,5335.57 4323.85,5995 3815,5995 3700,5880
NetIC3_15: IC3.15 pad.10 R19.2 | length 4299.5
  Top Layer w15: IC3.15 5110.19,2947.2 5090.25,2967.14 5090.25,3036.32 5217.9,3163.97 5217.9,3187.25
  Top Layer w25: v1(3700,5580) 3850,5730 ; pad.10 3850,5730 ; 5217.9,3187.25 5217.9,3592.01 4872.93,3936.98 4872.93,5262.45 4270.38,5865 3985,5865 3850,5730
  Bottom Layer w25: R19.2 v1(3700,5580)
NetIC3_16: IC3.16 pad.7 R27.2 | length 3391.9
  Top Layer w15: IC3.16 5284.91,2972.8 v2(5285.44,2973.32)
  Top Layer w25: v1(3710,4420) 3800,4510 ; pad.7 3800,4510 ; v1(4810,4685) 3975,4685 3800,4510
  Bottom Layer w15: 5088.44,3226.2 5088.44,3145.19 5260.31,2973.32 v2(5285.44,2973.32)
  Bottom Layer w25: R27.2 v1(3710,4420) ; v1(4810,4685) 4810,3999.75 5088.44,3721.31 5088.44,3226.2
NetIC3_19: IC3.19 IC6.7 pad.4 | length 4647.9
  Top Layer w15: IC3.19 5254.45,3049.57 5274.29,3069.41 5274.29,3170
  Top Layer w25: IC6.7 3420,5580 ; pad.4 3480,5640 3420,5580 ; 5274.29,3170 5274.29,3619.71 4929,3965 4929,5296 4290,5935 3920,5935 3565,5580 3420,5580
NetIC3_20: IC3.20 IC7.7 pad.5 | length 3690.8
  Top Layer w15: IC3.20 5232.4,3075.16 5242.58,3085.33 5242.58,3101.86 v2(5228.03,3116.4)
  Top Layer w25: IC7.7 3390,4380 ; pad.5 3470,4460 3390,4380 ; v1(4810,4740) 3890,4740 3530,4380 3390,4380
  Bottom Layer w15: 5154.22,3226.06 5154.22,3190.21 v2(5228.03,3116.4)
  Bottom Layer w25: v1(4810,4740) 4846.31,4740 4873,4713.31 4873,4020.54 5154.22,3739.31 5154.22,3226.06
NetIC4_3: IC4.3 R13.1 U3.2 | length 715.7
  Bottom Layer w40: U3.2 3797.38,2410 3892.38,2505 IC4.3
NetIC5_4: IC5.4 U3.4
NetJ3_2: 
NetJ4_1: J4.1 R12.2
NetJP3_4: 
NetJP3_5: 
NetLED1_1: LED1.1 R7.1 | length 85
  Top Layer w25: LED1.1 R7.1
NetLED2_1: LED2.1 R8.1 | length 90
  Top Layer w25: R8.1 LED2.1
NetQ1_1: Q1.1 R17.2 U4.3 | length 336.9
  Top Layer w60: Q1.1 3535,5030 U4.3
  Bottom Layer w40: U4.3 R17.2
NetQ4_1: Q4.1 R25.2 U5.3 | length 350.9
  Bottom Layer w40: Q4.1 3470,3825 3559,3736 U5.3 R25.2
NetR2_2: 
NetR11_2: R11.2 U3.1 | length 280
  Top Layer w40: U3.1 R11.2
NetR19_1: R19.1 R21.2 U4.1 | length 165
  Bottom Layer w40: U4.1 R19.1
NetR26_2: R26.2 R27.1 U5.1 | length 216
  Bottom Layer w40: U5.1 R27.1
OSC1: C11.1 IC3.5 X1.2 | length 341.9
  Top Layer w15: X1.2 4725,3006.61 C11.1 4859.46,3006.61 4893.28,2972.8 IC3.5
OSC2: C14.1 IC3.6 X1.1 | length 340.6
  Top Layer w15: X1.1 4720,2911.61 C14.1 4857.69,2911.61 4893.28,2947.2 IC3.6
RS: 
RST: C10.2 C16.3 IC3.4 R9.1 S1.2 | length 1032.7
  Top Layer w15: v2(4914.23,3011.47) 4927.32,2998.39 IC3.4
  Top Layer w25: C16.3 C10.2 R9.1 4819,2263.62 S1.2
  Bottom Layer w15: C16.3 4729,2644.27 4914.23,2829.5 v2(4914.23,3011.47)
RX2: 
SCK: 
SCL: 
SDA: 
STM8_RX: IC3.3 JP4.5 | length 883.1
  Top Layer w15: JP4.5 4879.58,3730.42 4940,3670 v2(4940,3182.8) ; IC3.3 5036.14,3023.98 v2(5036.39,3024.23)
  Bottom Layer w15: v2(4940,3182.8) 5036.39,3086.41 v2(5036.39,3024.23)
STM8_SCL: C15.2 IC3.12 | length 455.6
  Top Layer w15: IC3.12 5255.17,2870.43 5269.15,2856.45 5269.15,2760 5269,2759.85
  Top Layer w25: C15.2 5269,2759.85
STM8_SDA: C15.3 IC3.11 | length 401.6
  Top Layer w15: 5169,2800 5169,2831.06 5182.78,2844.84 IC3.11
  Top Layer w25: C15.3 5169,2800
STM8_SWIM: C16.2 IC3.18 | length 747.9
  Top Layer w15: v2(5137.82,3023.87) 5137.92,3023.98 IC3.18
  Bottom Layer w15: C16.2 4829,2579.52 5137.82,2888.34 v2(5137.82,3023.87)
STM8_TX: IC3.2 JP4.4 | length 703.1
  Top Layer w15: JP4.4 4879.58,3630.42 4902.5,3607.5 4902.5,3067.43 4920.36,3049.57 IC3.2
T_CS: 
T_DO: 
T_IQR: 
TX2: 
pads on no net: IC3.10 IC3.17 IC5.6 Q1. Q4. RL1.2 RL2.2 Transf2.3 Transf2.5 Transf2.7 Transf2.8 Transf2.9

## Polygon pours and split planes (outlines as drawn)
GND on Top Layer "GND_L01_P144" (solid, remove dead copper, pour order 144): 3405.49,2125 3405.49,3560 5460,3560 5469,3551 5469,2125
GND_IN on Top Layer "GND_IN_L01_P140" (solid, remove dead copper, pour order 140): 2485,3607.61 3010,3607.61 3010,3340 3254.51,3340 3254.51,2125 2485,2125
NetD3_1 on Top Layer "NETD3_1_L01_P138" (solid, remove dead copper, pour order 138): 3280,3000 3000,3000 3000,2916 2999.5,2915.5 2890.5,2915.5 2890.5,2620 3080,2620 3080,2910 3280,2910
NetC19_2 on Top Layer "NETC19_2_L01_P136" (solid, remove dead copper, pour order 136): 2235,3090 2055,3090 2055,3480 2786.88,3480 2786.88,3365 2700,3365 2700,3240 2520,3240 2520,3310 2235,3310
NetC17_2 on Top Layer "NETC17_2_L01_P134" (solid, remove dead copper, pour order 134): 2580,3083.18 3000,3083.18 3000,3020 3280,3020 3280,3340 3030,3340 3030,3235.99 3029.01,3235 3029.01,3220 2580,3220
NetC17_2 on Top Layer "NETC17_2_L01_P132" (solid, remove dead copper, pour order 132): 2620,2800 2620,2963.34 2655,2963.34 2655,3220 2470,3220 2470,3273.93 2275,3273.93 2275,3090 2485.98,3090 2485.98,2800
NetC18_2 on Top Layer "NETC18_2_L01_P130" (solid, remove dead copper, pour order 130): 2655,2800 2655,2940 2735,2940 2735,3055.35 2965,3055.35 2965,2940 2870,2940 2870,2800
NetIC5_4 on Top Layer "NETIC5_4_L01_P128" (solid, remove dead copper, pour order 128): 2890,2445.5 2981.99,2445.5 2981.99,2350 3280,2350 3280,2230 2890,2230
5V on Top Layer "5V_L01_P126" (solid, remove dead copper, pour order 126): 3970,3204 3800,3204 3800,3370 4140,3370 4140,3245 3970,3245
NetC23_1 on Top Layer "NETC23_1_L01_P124" (solid, remove dead copper, pour order 124): 3592.38,3120 3592.38,3370 3780,3370 3780,3180 4000,3180 4000,3080 3995,3075 3754.38,3075 3754.38,3120
NetC23_1 on Top Layer "NETC23_1_L01_P122" (solid, remove dead copper, pour order 122): 4017.09,2869.61 4202.38,2869.61 4202.38,3049.57 4201.95,3049.99 4140,3049.99 4140,3220 3990,3220 3990,3100.7 3754.38,3100.7 3754.38,3010 4017.38,3010
NetC23_1 on Top Layer "NETC23_1_L01_P120" (solid, remove dead copper, pour order 120): 4202.38,2888.34
NetD4_1 on Top Layer "NETD4_1_L01_P118" (solid, remove dead copper, pour order 118): 3380,2710 3570,2710 3570,2555 3780,2555 3780,2368.87 3560.3,2369.13 3559.96,2471 3380,2471
I1_IN on Top Layer "I1_IN_L01_P116" (solid, remove dead copper, pour order 116): 3200,5565 2885,5565 2885,5700 3200,5700
I1_OUT on Top Layer "I1_OUT_L01_P114" (solid, remove dead copper, pour order 114): 3015,5450 3200,5450 3200,5545 3015,5545
I2_IN on Top Layer "I2_IN_L01_P106" (solid, remove dead copper, pour order 106): 3005,4365 3190,4365 3190,4462 3005,4462
AC1 on Top Layer "AC1_L01_P112" (solid, remove dead copper, pour order 112): 2445,3750 2055,3750 2055,5050 2456,5050 2456,4885 2250,4885 2250,3925 2445,3925
I2_IN on Top Layer "I2_IN_L01_P104" (solid, remove dead copper, pour order 104): 2995,4259
I2_OUT on Top Layer "I2_OUT_L01_P102" (solid, remove dead copper, pour order 102): 3190,4345 3190,4245 3005,4245 3005,4345
GND on Top Layer "GND_L01_P082" (solid, remove dead copper, pour order 82): 3752.38,2705 3752.38,2990 3832.38,2990 3832.38,2705
NetC24_1 on Top Layer "NETC24_1_L01_P080" (solid, remove dead copper, pour order 80): 3717.38,2825 3717.38,3100 3592.38,3100 3592.38,2825
NetC24_1 on Top Layer "NETC24_1_L01_P078" (solid, remove dead copper, pour order 78): 3682.38,2580 3592.38,2580 3592.38,2830 3732.38,2830 3732.38,2705 3682.38,2705
NetC24_2 on Top Layer "NETC24_2_L01_P076" (solid, remove dead copper, pour order 76): 3867.38,2680 3867.38,2580 3712.38,2580 3712.38,2680
NetIC4_3 on Top Layer "NETIC4_3_L01_P072" (solid, remove dead copper, pour order 72): 3852.38,2830 3990,2830 3990,2580 3897.38,2580 3897.38,2705 3852.38,2705
NetC22_1 on Top Layer "NETC22_1_L01_P064" (solid, remove dead copper, pour order 64): 4017.13,2630 4202.38,2630 4202.38,2848.11 4017.66,2848.11
NetC22_1 on Top Layer "NETC22_1_L01_P060" (solid, remove dead copper, pour order 60): 4017.38,2580 4017.38,2830 4147.38,2830 4147.38,2580
NetC22_1 on Top Layer "NETC22_1_L01_P056" (solid, remove dead copper, pour order 56): 3817.38,2270 3817.38,2545 4017.38,2545 4017.38,2580 4147.38,2580 4147.38,2270
GND_IN on Top Layer "GND_IN_L01_P036" (solid, remove dead copper, pour order 36): 3245,2605
AC1 on Top Layer "AC1_L01_P004" (solid, remove dead copper, pour order 4): 2445,2600 2275,2600 2275,2975 2445,2975
NetJ4_1 on Top Layer "NETJ4_1_L01_P002" (solid, remove dead copper, pour order 2): 2275,2150.49 2275,2560 2445,2560 2445,2150.49
AC2 on Top Layer "AC2_L01_P000" (solid, remove dead copper, pour order 0): 2055,2150 2055,2975 2235,2975 2235,2150
GND on Bottom Layer "GND_L02_P146" (solid, remove dead copper, pour order 146): 3405.49,3560 3405.49,2125 5469,2125 5460,2134 5460,3560
GND_IN on Bottom Layer "GND_IN_L02_P142" (solid, remove dead copper, pour order 142): 3254.51,2125 2485,2125 2485,3607.61 2947.01,3607.61 2947.01,3340 3280,3340
AC2 on Bottom Layer "AC2_L02_P110" (solid, pour order 110): 2235,4660 2235,4025 2115,4025 2115,4660
AC2 on Bottom Layer "AC2_L02_P108" (solid, remove dead copper, pour order 108): 2250,5945 2500,5945 2500,5630 2235,5630 2235,4810 2055,4810 2055,5825 2250,5825
AC1 on Bottom Layer "AC1_L02_P010" (solid, remove dead copper, pour order 10): 2445,2600 2445,2975 2445,3755 2445,3925 2275,3925 2275,2850 2275,2600
AC2 on Bottom Layer "AC2_L02_P008" (solid, remove dead copper, pour order 8): 2055,2600 2055,4825 2500,4825 2500,4510 2235,4510 2235,2600
AC2 on Bottom Layer "AC2_L02_P006" (solid, remove dead copper, pour order 6): 2055,2650

## Keep-outs
Keep-Out Layer:
  lines w10: 2025,2125 2025,6050 4560,6050 5015,6050 5015,4005 5469,3551 5469,3540 5469,2746 5469,2125 4575,2125 2025,2125 ; 3280,2230 3380,2230 3380,3340 3355,3340 3305,3340 3280,3340 3280,2317.64 3280,2230

## Silkscreen, mask and mechanical layers (free items; w line width, h text height)
Top Overlay:
  drawing of 1343 lines, arcs and shapes, not listed
  text "CN1_O/F" at 3515,5967.13 h30
  text "Channel 1" at 2115,5845 h30 r270
  text "CN1_ADC" at 3540,5730 h30
  text "CN2_PWM" at 3745,5725 h30
  text "Channel 2" at 2115,4780 h30 r270
  text "CN2_O/F" at 3615,4650 h30
  text "PROJECT 2" at 4418.12,4550 h40
  text "CN2_PWM" at 3715,4505 h30
  text "CN2_ADC" at 3520,4490 h30
  text "@Ven @Dung" at 4378.12,4435 h40
  text "Slave" at 4550,4190 h60
  text "5V" at 3859.57,3452.5 h30
  text "GND" at 3727.38,3450.42 h30
  text "RST" at 4705,2540 h30
  text "SWIM" at 4794,2540 h30
  text "SDA" at 5145,2540 h30
  text "SCL" at 5245,2540 h30
  text "+" at 5362,2535 h30

## Text inside footprints (layer, text, board x,y; h text height)
C19: Top Overlay "+" at 2566,3157.71 h30 r90
C20: Top Overlay "+" at 2861,3157.71 h30 r90
C22: Top Overlay "+" at 4080.38,2558.45 h30
C23: Top Overlay "+" at 4080.38,3204 h30
C27: Top Overlay "+" at 4512,4920 h30 r90
C31: Top Overlay "+" at 4502,3731 h30 r90
DB2: Top Overlay "~" at 2180,2955 h30; Top Overlay "~" at 2380,2955 h30; Top Overlay "-" at 2185,3050 h30; Top Overlay "+" at 2345,3050 h30 r270
DB3: Top Overlay "~" at 2735,5160 h30 r270; Top Overlay "~" at 2735,4960 h30 r270; Top Overlay "-" at 2830,5155 h30 r270; Top Overlay "+" at 2830,4995 h30 r180
DB4: Top Overlay "~" at 2735,4035 h30 r270; Top Overlay "~" at 2735,3835 h30 r270; Top Overlay "-" at 2830,4030 h30 r270; Top Overlay "+" at 2830,3870 h30 r180
Transf2: Top Overlay "10" at 3400,3083.18 h30 r270; Top Overlay "9" at 3400,2973.18 h30 r270; Top Overlay "8" at 3400,2873.18 h30 r270; Top Overlay "7" at 3400,2773.18 h30 r270; Top Overlay "6" at 3400,2673.18 h30 r270; Top Overlay "5" at 3220,2673.42 h30 r270; Top Overlay "4" at 3220,2773.18 h30 r270; Top Overlay "3" at 3220,2873.18 h30 r270; Top Overlay "2" at 3220,2973.18 h30 r270; Top Overlay "1" at 3220,3073.18 h30 r270